# Altium PCB PCB_BLDC_DRV_Havoc_utlis_2025-07-22.pcbdoc (part 2 of 2)
Units mm, origin at the board's own origin, x right, y up, seen from the top; angles counter-clockwise.
Board outline 137.44 x 106.49 mm, 2 copper layers (Top Layer, Bottom Layer); 116 components, 98 nets, 405 pads, 307 vias.
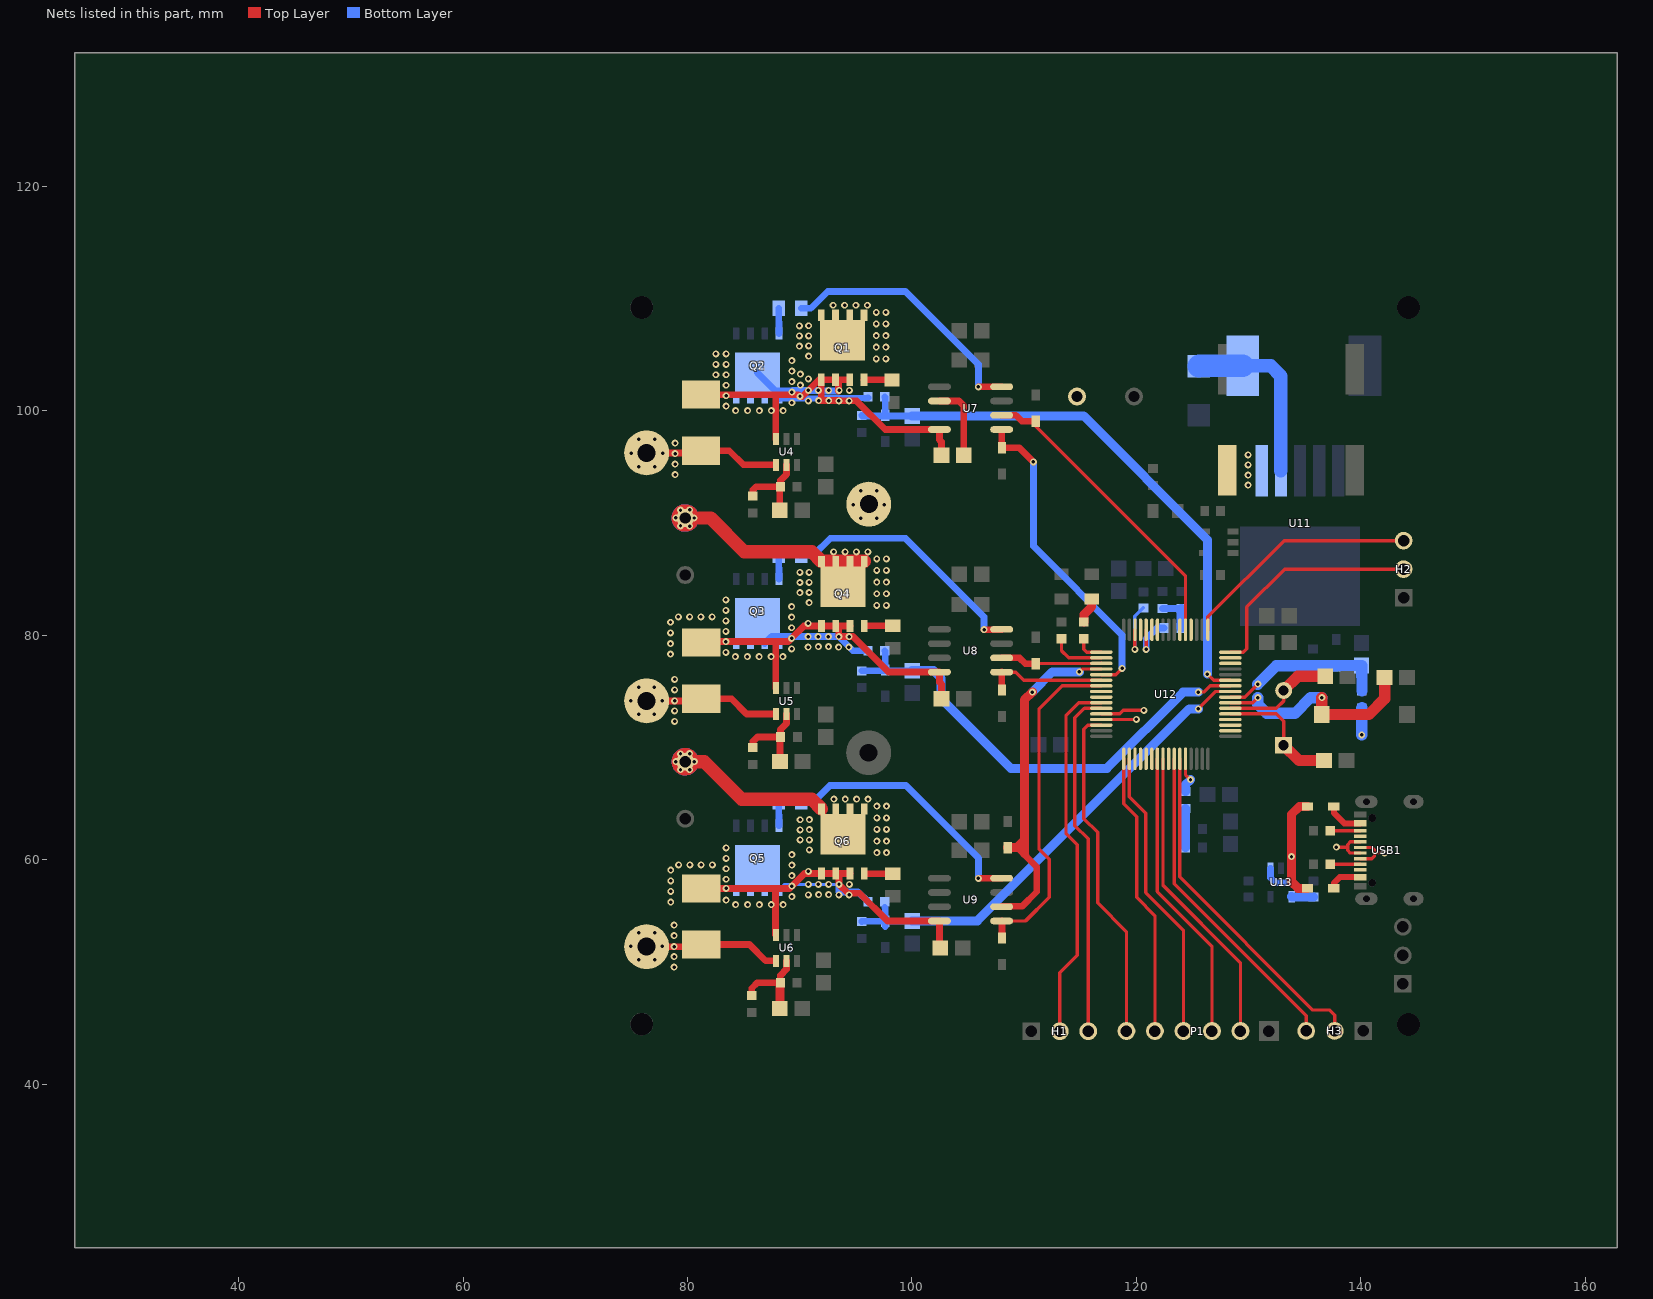
[diagram p2: the nets of this part, all layers, seen from the top]

## Via types
v1: diameter 0.62, hole 0.31, Top Layer to Bottom Layer, tented both sides, 307 vias

## Nets (pads, with @x,y where several pads share a name; then routed paths per layer and width w, separated by ;. In a path a pad name is that pad's centre, name@x,y a point inside that pad or via, vN(x,y) a via of type N, cw(c..) or ccw(c..) an arc to the next point about the centre after c; other vN are vias at no path point) (continued)
I2C1_SCL: H3.3 U12.58 | length 29.1
  Top Layer w0.3: U12.58@123.37,68.981 123.37,57.831 135.13,46.071 H3.3@135.13,44.731
I2C1_SDA: H3.2 U12.59 | length 30.8
  Top Layer w0.3: U12.59@123.87,68.981 123.87,58.451 135.729,46.591 137.22,46.591 137.67,46.142 H3.2@137.67,44.731
JTCK_SWCLK: P1.5 U12.49 | length 25.4
  Top Layer w0.3: U12.49@118.87,68.981 118.869,64.981 120.019,63.83 120.019,56.642 121.65,55.011 P1.5@121.65,44.719
JTDI: P1.4 U12.50 | length 26.3
  Top Layer w0.3: U12.50@119.37,68.981 119.369,65.58 120.82,64.13 120.82,57.061 124.19,53.691 P1.4@124.19,44.72
JTDO: P1.3 U12.55 | length 26.3
  Top Layer w0.3: U12.55@121.871,68.981 121.871,57.15 126.73,52.291 P1.3@126.73,44.72
JTMS_SWDIO: P1.6 U12.46 | length 30.2
  Top Layer w0.3: U12.46@116.87,71.98 115.671,71.981 115.32,71.631 115.32,63.64 116.54,62.421 116.54,56.152 119.11,53.581 P1.6@119.11,44.719
LO1: R2.1 U7.8 | length 23.2
  Top Layer w0.6: v1(105.92,102.13) U7.8@107.992,102.135
  Bottom Layer w0.6: R2.1@90.121,109.131 90.99,109.131 92.491,110.63 99.42,110.63 105.92,104.13 v1(105.92,102.13)
LO2: R3.1 U8.8 | length 22.5
  Top Layer w0.6: v1(106.42,80.49) 107.967,80.49 U8.8@107.992,80.515
  Bottom Layer w0.6: R3.1@90.12,87.13 91.22,87.131 92.718,88.629 99.419,88.629 106.42,81.628 v1(106.42,80.49)
LO3: R6.1 U9.8 | length 23
  Top Layer w0.6: v1(105.92,58.33) U9.8@107.992,58.336
  Bottom Layer w0.6: R6.1@90.121,65.131 91.221,65.131 92.681,66.591 99.458,66.591 105.92,60.13 v1(105.92,58.33)
MA_CS: C7.1 Q1.1 Q1.2 Q1.3 Q2.5 Q2.6 Q2.7 Q2.8 R13.2 U1.2 U4.3 U7.4 | length 50.9
  Top Layer w0.6: U1.2@81.22,101.43 89.86,101.43 v1(90.02,101.27) 90.224,101.27 91.709,102.755 Q1.1@91.915,102.755 Q1.3@94.455,102.755 ; 87.83,101.43 87.87,101.39 U4.3@87.87,97.479 ; Q1.1@91.915,102.755 91.914,101.105 91.73,100.92 91.73,100.9 92.68,100.9 93.597,100.9 93.616,100.881 94.403,100.881 95.059,100.881 97.614,98.326 U7.4@102.447,98.325 ; Q1.2@93.185,102.755 93.46,102.48 v1@93.46,101.76 ; U7.4@102.447,98.325 102.447,97.403 102.62,97.23 C7.1@102.62,96.03
  Bottom Layer w0.6: Q2.8@86.24,103.372 87.852,101.76 89.299,101.76 89.344,101.806 90.76,101.806 92.004,101.806 92.05,101.76 92.761,101.76 v1@93.46,101.76 ; Q2.5@88.15,101.06 R13.2@96.072,101.156
  other v1: 84.29,100.01 85.347,100.01 86.405,100.01 87.462,100.01 88.52,100.01 83.442,100.4 89.295,100.71 90.765,100.871 93.494,100.871 94.403,100.871 91.674,100.9 92.584,100.9 83.442,101.334 89.295,101.65 90.765,101.806 91.661,101.805 92.581,101.805 93.5,101.805 94.42,101.805 83.442,102.268 90.06,102.28 89.295,102.59 90.76,102.84 82.53,103.203 83.442,103.203 90.05,103.26 89.295,103.531 82.53,104.137 83.442,104.137 89.295,104.471 82.53,105.071 83.442,105.071
MA_PH: pad.2@76.35,96.24 U1.1 U4.4 | length 12.1
  Top Layer w0.6: pad.2@76.4,96.24 81.03,96.24 U1.1@81.22,96.43 ; U1.1@81.221,96.431 83.72,96.431 84.97,95.182 U4.4@87.871,95.182
  other v1: 78.89,94.311 75.67,95.011 77.07,95.011 78.89,95.243 78.89,96.175 74.97,96.223 77.77,96.223 78.89,97.108 75.67,97.435 77.07,97.435
MA_VSENSE: C19.2 D7.1 R13.1 R14.2 U12.11 | length 51.3
  Top Layer w0.3: v1(126.32,76.531) 126.87,75.981 U12.11@128.37,75.98
  Bottom Layer w0.6: R14.2@95.52,99.584 95.573,99.531 C19.2@100.02,99.53 ; R13.1@97.573,101.23 97.62,101.183 D7.1@97.62,99.603
  Bottom Layer w0.8: C19.2@100.02,99.53 115.29,99.53 126.319,88.501 v1(126.32,76.531)
MB_CS: C8.1 Q3.5 Q3.6 Q3.7 Q3.8 Q4.1 Q4.2 Q4.3 R16.2 U2.2 U5.3 U8.4 | length 43.9
  Top Layer w0.6: U2.2@81.221,79.431 88.982,79.431 v1(89.271,79.72) 90.366,80.815 Q4.3@94.475,80.815 Q4.1@91.935,80.815 ; U5.3@87.87,75.279 87.87,79.431 ; Q4.2@93.205,80.815 93.477,80.543 v1(93.477,79.875) 94.734,79.875 97.904,76.706 U8.4@102.447,76.705 102.448,75.803 102.62,75.63 C8.1@102.62,74.33
  Bottom Layer w0.6: Q3.6@86.875,79.255 87.494,79.875 v1(93.477,79.875) 94.741,78.611 95.647,78.611
  other v1: 84.266,78.08 85.324,78.08 86.381,78.08 87.439,78.08 88.496,78.08 78.481,78.3 83.419,78.47 89.271,78.78 90.741,78.941 93.47,78.941 94.38,78.941 91.651,78.97 92.56,78.97 78.481,79.25 83.419,79.431 90.741,79.875 91.637,79.874 92.557,79.875 94.396,79.875 78.481,80.2 83.419,80.338 89.271,80.66 90.741,81.041 78.481,81.15 83.419,81.272 79.186,81.62 80.19,81.62 81.194,81.62 82.198,81.62 89.271,81.6 83.419,82.206 89.271,82.54 83.419,83.14
MB_PH: pad.2@76.35,74.14 U2.1 U5.4 | length 12.1
  Top Layer w0.6: pad.2@76.4,74.14 81.03,74.14 U2.1@81.22,74.33 83.921,74.331 85.27,72.982 U5.4@87.871,72.982
  other v1: 78.85,72.321 75.64,72.941 77.04,72.941 78.85,73.253 74.94,74.153 77.74,74.153 78.85,74.141 78.85,75.118 75.64,75.365 77.04,75.365 78.85,76.05
MB_VSENSE: C20.2 D8.1 R15.2 R16.1 U12.10 | length 44.7
  Top Layer w0.3: v1(125.52,74.93) 126.02,74.93 126.57,75.481 U12.10@128.37,75.481
  Bottom Layer w0.6: R15.2@95.521,76.825 C20.2@100.02,76.831 ; R16.1@97.573,78.61 97.62,78.563 D8.1@97.62,76.903 97.692,76.831 C20.2@100.02,76.831
  Bottom Layer w0.8: C20.2@100.02,76.831 101.93,76.83 102.6,76.159 102.6,74.341 108.81,68.131 117.36,68.131 124.16,74.93 v1@125.521,74.93
MC_CS: C9.1 Q5.5 Q5.6 Q5.7 Q5.8 Q6.1 Q6.2 Q6.3 R18.2 U3.2 U6.3 U9.4 | length 40.9
  Top Layer w0.6: U3.2@81.221,57.43 89.091,57.43 v1(89.291,57.63) 90.416,58.755 Q6.3@94.475,58.756 ; 87.843,57.43 87.843,53.307 U6.3@87.87,53.28 ; Q6.2@93.205,58.756 93.497,58.463 v1(93.497,57.785) 94.281,57 95.341,57 97.815,54.526 U9.4@102.447,54.526 102.448,53.603 102.448,52.203 C9.1@102.52,52.131
  Bottom Layer w0.3: Q5.5@88.144,57.255 88.673,57.785 v1(93.497,57.785)
  Bottom Layer w0.6: v1(93.497,57.785) 93.497,57.12 95.196,57.12 R18.2@96.067,56.251
  other v1: 84.286,55.99 85.344,55.99 86.401,55.99 87.459,55.99 88.516,55.99 78.501,56.21 83.439,56.38 89.291,56.69 90.761,56.85 93.49,56.85 94.4,56.851 91.671,56.88 92.581,56.88 78.501,57.16 83.439,57.43 90.761,57.786 91.658,57.785 92.577,57.785 94.416,57.785 78.501,58.11 83.439,58.248 89.291,58.57 90.761,58.95 78.501,59.06 83.439,59.182 89.291,59.51 79.206,59.53 80.21,59.53 81.214,59.53 82.218,59.53 83.439,60.116 89.291,60.45 83.439,61.05
MC_PH: pad.2@76.35,52.241 U3.1 U6.4 | length 12.2
  Top Layer w0.6: pad.2@76.3,52.241 81.03,52.241 U3.1@81.22,52.431 85.511,52.431 86.959,50.98 U6.4@87.871,50.98
  other v1: 78.8,50.421 75.66,51.061 77.06,51.06 78.8,51.353 78.8,52.241 74.96,52.273 77.76,52.273 78.8,53.218 75.66,53.485 77.06,53.485 78.8,54.151
MC_VSENSE: C21.2 D9.1 R17.2 R18.1 U12.9 | length 43.1
  Top Layer w0.3: v1(125.52,73.43) 127.07,74.981 U12.9@128.37,74.98
  Bottom Layer w0.6: R17.2@95.521,54.483 D9.1@97.62,54.503 ; 97.573,55.751 97.62,55.703 97.62,54.003 ; D9.1@97.62,54.503 99.992,54.503 C21.2@100.02,54.531
  Bottom Layer w0.8: C21.2@100.02,54.531 105.821,54.531 124.721,73.432 v1@125.521,73.432
NC: 
NJTRST: P1.2 U12.56 | length 27.1
  Top Layer w0.3: U12.56@122.37,68.981 122.369,57.719 129.27,50.818 P1.2@129.27,44.72
Q1_4: Q1.4 R1.2 | length 2.5
  Top Layer w0.6: Q1.4@95.725,102.755 R1.2@98.22,102.73
Q2_4: Q2.4 R2.2 | length 2.2
  Bottom Layer w0.6: R2.2@88.12,109.13 Q2.4@88.145,106.885
Q3_4: Q3.4 R3.2 | length 2.1
  Bottom Layer w0.6: R3.2@88.12,87.13 Q3.4@88.145,85.005
Q4_4: Q4.4 R4.2 | length 2.5
  Top Layer w0.6: Q4.4@95.745,80.815 R4.2@98.282,80.831
Q5_4: Q5.4 R6.2 | length 2.1
  Bottom Layer w0.6: R6.2@88.12,65.131 Q5.4@88.145,63.005
Q6_4: Q6.4 R5.2 | length 2.5
  Top Layer w0.6: Q6.4@95.745,58.756 R5.2@98.282,58.731
QH1: D2.1 U7.5 U12.37 | length 28.7
  Top Layer w0.3: U12.37@116.87,76.481 118.17,76.481 v1(118.72,77.03)
  Top Layer w0.6: U7.5@107.992,98.325 107.992,96.73 108.02,96.703 109.547,96.703 v1(110.82,95.43)
  Bottom Layer w0.6: v1(110.82,95.43) 110.82,87.931 118.72,80.03 v1(118.72,77.03)
QH2: D4.1 U8.5 U12.38 | length 10.8
  Top Layer w0.3: U8.5@107.992,76.705 109.245,76.706 109.969,75.982 U12.38@116.87,75.98
  Top Layer w0.6: U8.5@107.992,76.705 107.992,75.131 D4.1@108.02,75.103
QH3: D6.1 U9.5 U12.39 | length 30.2
  Top Layer w0.3: U9.5@107.992,54.526 110.116,54.526 112.219,56.629 112.219,60.03 111.32,60.93 111.32,73.432 113.37,75.481 U12.39@116.87,75.481
  Top Layer w0.6: U9.5@107.992,54.526 108.02,54.498 D6.1@108.02,53.003
QL1: D1.1 U7.6 U12.21 | length 27.4
  Top Layer w0.3: D1.1@111.02,99.058 111.048,99.03 111.048,98.603 124.37,85.281 U12.21@124.37,80.48
  Top Layer w0.6: U7.6@107.992,99.595 109.255,99.596 109.793,99.058 D1.1@111.02,99.058
QL2: D3.1 U8.6 U12.35 | length 9.1
  Top Layer w0.3: D3.1@111.02,77.458 U12.35@116.87,77.481
  Top Layer w0.6: U8.6@107.992,77.975 109.575,77.976 110.093,77.457 D3.1@111.02,77.458
QL3: D5.1 U9.6 U12.36 | length 33.3
  Top Layer w0.3: v1(114.92,76.73) 115.17,76.981 U12.36@116.87,76.98
  Top Layer w0.6: U9.6@107.992,55.796 108.028,55.829 109.819,55.829 111.119,57.13 111.119,59.329 109.392,61.059 D5.1@108.521,61.059
  Top Layer w0.8: D5.1@108.52,61.058 109.347,61.058 110.02,61.73 110.02,74.23 v1(110.72,74.93) ; 110.02,60.531 110.02,62.33
  Bottom Layer w0.8: v1(110.72,74.93) 112.52,76.73 v1(114.92,76.73)
R21_2: R21.2 R22.2 R23.2 | length 3.5
  Bottom Layer w0.6: R23.2@122.32,82.377 R22.2@124.02,82.377
  Bottom Layer w0.8: R21.2@123.973,80.63 123.973,82.331 R22.2@124.02,82.377
R24_2: R24.2 R25.2 R26.2 | length 3.5
  Bottom Layer w0.8: R26.2@124.37,64.547 R24.2@124.367,62.72 R25.2@124.377,61.08
R31_2: DS3.2 R31.2 | length 2.3
  Top Layer w0.8: R31.2@115.32,81.184 115.32,81.831 116.019,82.53 DS3.2@116.02,83.231
S$164: 
U7_2: C7.2 U7.2 | length 6.8
  Top Layer w0.6: U7.2@102.447,100.865 104.185,100.865 104.62,100.43 C7.2@104.62,96.03
U11_2: D11.1 L1.2 U11.2 | length 16.1
  Bottom Layer w1.2: L1.2@129.471,104 131.96,104 132.879,103.081 U11.2@132.88,94.65
  Bottom Layer w2: D11.1@125.57,103.98 125.59,104 L1.2@129.47,104
U12_2: U12.2
U12_3: U12.3
U12_4: U12.4
U12_5: C37.1 U12.5 X1.1 | length 11.3
  Top Layer w0.3: U12.5@128.371,72.979 132.47,72.979 133.121,72.332 X1.1@133.121,70.19
  Top Layer w1: X1.1@133.12,70.19 134.48,68.831 C37.1@136.72,68.83
U12_6: C38.1 U12.6 X1.2 | length 10.2
  Top Layer w0.3: U12.6@128.371,73.48 132.47,73.48 133.121,74.13 X1.2@133.121,75.07
  Top Layer w1: X1.2@133.12,75.07 134.38,76.33 C38.1@136.82,76.33
U12_7: C36.1 RESET1.2 U12.7 | length 19.4
  Top Layer w0.3: U12.7@128.37,73.98 130.37,73.981 v1(130.82,74.43)
  Top Layer w1: v1(136.52,74.43) RESET1.2@136.52,72.931 140.72,72.93 142.12,74.33 C36.1@142.12,76.23
  Bottom Layer w1: v1(130.82,74.43) 130.819,73.83 131.62,73.03 134.119,73.03 135.521,74.43 v1(136.52,74.43)
U12_14: U12.14
U12_15: U12.15
U12_20: U12.20
U12_22: U12.22
U12_26: U12.26
U12_27: U12.27
U12_28: R21.1 U12.28 | length 4.7
  Top Layer w0.3: v1(120.87,78.73) U12.28@120.87,80.48
  Bottom Layer w0.6: v1(120.87,78.73) 120.87,79.68 121.82,80.63 R21.1@122.467,80.63
U12_29: U12.29
U12_30: C39.2 U12.30 | length 5.8
  Top Layer w0.3: v1(119.86,78.73) 119.86,80.47 U12.30@119.87,80.48
  Bottom Layer w0.3: v1(119.86,78.73) 119.86,81.67 C39.2@120.62,82.431
U12_33: R31.1 U12.33 | length 2.6
  Top Layer w0.3: R31.1@115.32,79.677 115.32,78.73 115.569,78.481 U12.33@116.87,78.481
U12_34: R30.1 U12.34 | length 4.9
  Top Layer w0.3: R30.1@113.32,79.677 113.32,78.63 113.97,77.98 U12.34@116.87,77.98
U12_40: U12.40
U12_41: U12.41
U12_51: U12.51
U12_52: U12.52
U12_53: U12.53
U12_54: U12.54
U12_57: U12.57
U12_60: R26.1 U12.60 | length 3.3
  Top Layer w0.3: U12.60@124.37,68.981 124.37,67.579 v1(124.82,67.131)
  Bottom Layer w0.8: R26.1@124.37,66.054 124.37,66.681 v1(124.82,67.131)
U13_4: C41.2 U13.4 | length 1.9
  Bottom Layer w0.8: U13.4@133.84,56.689 133.859,56.67 C41.2@135.77,56.671
USART1_RX: H1.3 U12.43 | length 31.1
  Top Layer w0.3: H1.3@115.71,44.701 115.709,61.841 114.52,63.03 114.52,72.631 115.369,73.48 U12.43@116.87,73.481
USART1_TX: H1.2 U12.42 | length 32.8
  Top Layer w0.3: H1.2@113.17,44.701 113.169,49.921 114.721,51.471 114.721,61.331 113.72,62.332 113.72,72.83 114.871,73.98 U12.42@116.87,73.98
USART2_RX: H2.3 U12.17 | length 21.5
  Top Layer w0.3: U12.17@126.37,80.48 126.369,81.631 133.159,88.42 H2.3@143.949,88.42
USART2_TX: H2.2 U12.16 | length 20.8
  Top Layer w0.3: U12.16@128.371,78.481 129.539,78.481 129.829,78.771 129.829,82.509 133.199,85.88 H2.2@143.949,85.88
USB1_2: D12.2 USB1.2 | length 3
  Top Layer w0.53: D12.2@137.592,57.431 137.591,57.902 138.119,58.43 USB1.2@139.946,58.43
USB1_3: USB1.3
USB1_4: R27.1 USB1.4 | length 2.7
  Top Layer w0.3: R27.1@137.273,59.581 USB1.4@139.945,59.581
USB1_9: USB1.9
USB1_10: R28.1 USB1.10 | length 2.7
  Top Layer w0.3: R28.1@137.273,62.581 USB1.10@139.945,62.581
USB1_11: D13.2 USB1.11 | length 3.3
  Top Layer w0.53: D13.2@137.592,64.731 137.591,64.158 138.521,63.231 USB1.11@139.946,63.231
USB_5V: D12.1 D13.1 U13.1 U13.3 | length 14.4
  Top Layer w0.8: D12.1@135.247,57.431 134.419,57.43 133.819,58.031 v1(133.819,60.262) 133.819,64.031 134.52,64.729 D13.1@135.247,64.731
  Bottom Layer w0.6: U13.1@131.94,59.232 131.94,58.379 132.379,57.94 133.39,57.94 133.84,58.39 U13.3@133.84,59.232 v1(133.819,60.262)
USB_DM: U12.44 USB1.5 USB1.7 | length 34.8
  Top Layer w0.3: U12.44@116.87,72.98 118.52,72.98 118.84,73.3 v1(120.66,73.3) ; USB1.5@139.946,60.081 140.969,60.081 141.221,60.33 141.221,60.831 140.969,61.079 USB1.7@139.946,61.079 ; 141.221,60.528 141.273,60.58 v1(142.11,60.58)
  Mid-Layer 2 w0.6: v1(120.66,73.3) 125.021,68.941 131.871,68.941 140.23,60.582 v1(142.11,60.58)
USB_DP: U12.45 USB1.6 USB1.8 | length 32.8
  Top Layer w0.3: U12.45@116.87,72.481 v1(119.99,72.49) ; v1(137.82,61.101) 138.778,61.101 138.82,61.143 ; USB1.6@139.946,60.582 139.069,60.582 138.82,60.831 138.82,61.341 139.059,61.58 USB1.8@139.946,61.58
  Mid-Layer 2 w0.6: v1(119.99,72.49) 121.879,70.599 121.879,66.601 123.469,65.011 130.52,65.011 135.361,60.17 136.38,60.17 137.309,61.1 v1(137.82,61.101)
VBAT+: C16.1 C17.1 C18.1 C27.1 pad.2@96.15,91.671 Q1.5 Q1.6 Q1.7 Q1.8 Q4.5 Q4.6 Q4.7 Q4.8 Q6.5 Q6.6 Q6.7 Q6.8 R20.2 U11.1 | length 195.9
  Top Layer w0.8: C16.1@79.791,90.439 v1(80.58,90.439) ; v1(80.611,68.721) ccw(c79.79,68.721) v1(80.611,68.721) ; v1@80.611,90.44 ccw(c79.79,90.44) v1@80.611,90.44
  Top Layer w1.2: C17.1@79.791,68.72 81.49,68.72 84.83,65.38 91.058,65.38 Q6.8@91.935,64.506 ; C16.1@79.791,90.439 82.059,90.439 85.059,87.44 91.061,87.44 Q4.8@91.935,86.565 Q4.5@95.745,86.565
  Mid-Layer 1 w0.8: v1(80.611,68.721) ccw(c79.79,68.721) v1(80.611,68.721) ; v1@80.611,90.44 ccw(c79.79,90.44) v1@80.611,90.44
  Mid-Layer 1 w1.2: v1@92.98,109.41 96.15,106.24 pad.2@96.15,91.671 105.11,91.67 C18.1@114.7,101.26 116.369,101.26 122.463,95.166 v1@129.961,95.166 ; v1(93.025,87.425) 96.985,87.425 100.49,83.92 100.49,66.431 99.36,65.3 93.3,65.3 v1@93.21,65.39 ; v1(129.96,93.36) 140.08,83.24 v1(140.08,71.11)
  Mid-Layer 2 w0.8: v1(80.611,68.721) ccw(c79.79,68.721) v1(80.611,68.721) ; v1@80.611,90.44 ccw(c79.79,90.44) v1@80.611,90.44
  Bottom Layer w0.8: v1(80.611,68.721) ccw(c79.79,68.721) v1(80.611,68.721) ; v1@80.611,90.44 ccw(c79.79,90.44) v1@80.611,90.44
  Bottom Layer w1: v1(140.08,71.11) 140.08,73.517 R20.2@140.09,73.527
  other v1: 96.875,60.611 97.73,60.611 90.855,60.861 96.875,61.648 97.73,61.648 90.03,61.751 90.855,61.76 90.03,62.651 90.855,62.661 96.875,62.686 97.73,62.686 90.03,63.551 90.855,63.561 96.875,63.723 97.73,63.723 96.875,64.76 97.73,64.76 93.04,65.386 94.053,65.386 95.066,65.386 96.08,65.386 80.193,68.005 79.372,68.014 78.968,68.721 79.372,69.427 80.193,69.436 96.86,82.65 97.715,82.65 90.84,82.901 96.86,83.688 97.715,83.688 90.015,83.791 90.84,83.801 90.015,84.691 90.84,84.7 96.86,84.726 97.715,84.726 90.015,85.591 90.84,85.6 96.86,85.763 97.715,85.763 96.86,86.801 97.715,86.801 94.038,87.426 95.051,87.425 96.065,87.425 80.193,89.725 79.372,89.733 95.45,90.428 96.85,90.428 78.968,90.44 79.372,91.147 80.193,91.156 94.75,91.641 97.55,91.641 95.45,92.853 96.85,92.853 129.96,94.264 129.96,95.167 129.96,96.071 96.815,104.62 97.67,104.62 90.795,104.87 96.815,105.658 97.67,105.658 89.97,105.761 90.795,105.771 89.97,106.661 90.795,106.67 96.815,106.695 97.67,106.695 89.97,107.56 90.795,107.57 96.815,107.733 97.67,107.733 96.815,108.771 97.67,108.771 92.98,109.395 93.993,109.395 95.006,109.395 96.02,109.395
VBAT_VSENSE: C22.2 D10.1 R19.2 R20.1 U12.8 | length 15.1
  Top Layer w0.3: U12.8@128.37,74.481 129.67,74.481 v1(130.82,75.63)
  Bottom Layer w1: v1(130.82,75.63) 132.467,77.277 R19.2@135.74,77.277 ; R19.2@135.74,77.277 D10.1@137.81,77.278 C22.2@140.07,77.29 R20.1@140.09,75.034
VREFA_1.65: C1.2 R7.1 R8.2 U4.5 | length 7.4
  Top Layer w0.6: R8.2@85.821,92.382 85.821,92.931 86.121,93.231 R7.1@88.267,93.23 ; C1.2@88.22,91.13 88.22,93.184 R7.1@88.267,93.23 ; U4.5@88.821,95.182 88.821,94.331 88.267,93.777 R7.1@88.267,93.23
VREFB_1.65: C3.2 R9.2 R10.1 U5.5 | length 7.7
  Top Layer w0.6: R9.2@85.821,69.985 85.826,70.536 86.225,70.93 R10.1@88.277,70.931 88.277,71.587 88.821,72.131 U5.5@88.821,72.982 ; C3.2@88.23,68.731 88.23,70.884 R10.1@88.277,70.931
VREFC_1.65: C5.2 R11.2 R12.1 U6.5 | length 7.9
  Top Layer w0.6: R11.2@85.72,47.884 85.719,48.532 86.22,49.03 R12.1@88.267,49.031 88.267,49.677 88.821,50.231 U6.5@88.821,50.98
  Top Layer w0.8: C5.2@88.22,46.731 88.22,48.984 R12.1@88.267,49.031
pads on no net: USB1.

## Polygon pours and split planes (outlines as drawn)
12V on Bottom Layer (solid): 138.91,106.72 138.94,106.75 143.15,106.75 143.17,106.73 143.17,101.28 143.16,101.29 138.9,101.29 138.88,101.31 138.88,106.75
VBAT+ on Bottom Layer (solid): 128.61,96.94 128.62,96.93 131.73,96.93 131.77,96.88 131.77,92.38 131.73,92.42 128.6,92.42
NC on Bottom Layer (solid): 128.68,110.23 128.7,110.21 141.08,110.21 141.1,110.19 141.1,97.89 141.07,97.86 128.68,97.86
MA_CS on Bottom Layer (solid): 65.94,105.42 88.91,105.42 88.95,105.42 90.88,103.49 94.59,103.49 94.76,103.32 94.76,100.25 94.75,100.24 94.71,100.24 93.95,99.48 65.95,99.48 64.3,102.54
MA_PH on Bottom Layer (solid): 68.47,98.47 85.22,98.47 85.22,94.62 84.46,93.86 68.46,93.86 68.45,93.87 66.96,96.23
GND on Bottom Layer (solid): 68.059,106.02 87.159,106.02 87.399,106.26 87.399,107.95 86.999,108.35 86.999,113.86 86.059,114.8 68.049,114.84 64.829,110.36
VBAT+ on Bottom Layer (solid): 87.585,114.795 87.585,108.585 88.095,108.075 88.095,106.065 89.195,106.065 91.065,104.195 101.065,104.195 101.075,104.185 101.075,104.205 101.305,104.435 101.305,107.525 103.935,110.155 103.935,114.775 103.955,114.795
MB_CS on Bottom Layer (solid): 65.992,83.52 88.96,83.52 89.001,83.52 90.931,81.59 94.64,81.59 94.811,81.42 94.811,78.35 94.801,78.34 94.761,78.34 94.001,77.58 66.001,77.58 64.351,80.64
MC_CS on Bottom Layer (solid): 65.982,61.57 88.95,61.57 88.99,61.57 90.92,59.64 94.63,59.64 94.8,59.47 94.8,56.4 94.79,56.39 94.75,56.39 93.99,55.63 65.992,55.63 64.341,58.69
MB_PH on Bottom Layer (solid): 68.481,76.47 85.23,76.47 85.23,72.62 84.47,71.86 68.471,71.86 68.461,71.87 66.97,74.23
MC_PH on Bottom Layer (solid): 68.46,54.59 85.21,54.59 85.21,50.74 84.45,49.98 68.45,49.98 68.44,49.99 66.95,52.35
VBAT+ on Bottom Layer (solid): 96.936,94.689 100.437,91.189 100.437,91.169 100.487,91.119 104.686,91.119 104.706,91.099 104.706,86.169 101.907,83.369 101.907,80.929 101.807,80.829 88.137,80.829 87.967,81.169 87.907,88.609 88.767,88.619 89.907,88.619 93.247,91.959 93.247,94.699
VBAT+ on Bottom Layer (solid): 99.54,66.89 101.25,65.231 99.78,63.76 99.78,63.67 99.78,58.54 99.75,58.57 87.88,58.57 87.68,58.77 87.72,65.541 91.07,65.501 92.47,66.901
GND on Bottom Layer (solid): 58.15,119.19 149.78,119.19 150.14,118.83 150.14,38.291 149.95,38.101 57.97,38.101 43.18,79.19
NC on Mid-Layer 2 (solid): 128.68,110.23 128.7,110.21 141.08,110.21 141.1,110.19 141.1,97.89 141.07,97.86 128.68,97.86
MA_CS on Mid-Layer 2 (solid): 88.91,105.42 88.95,105.42 90.88,103.49 94.59,103.49 94.76,103.32 94.76,100.25 94.75,100.24 94.71,100.24 93.95,99.48 83.81,99.48 82.89,100.3 82.9,102.22 82.07,102.81 82.06,105.42
MA_PH on Mid-Layer 2 (solid): 68.47,98.47 77.85,98.47 79.27,97.31 79.27,94.18 78.95,93.86 68.46,93.86 68.45,93.87 67.77,96.17
VBAT+ on Mid-Layer 2 (solid): 87.585,114.795 87.585,108.585 88.095,108.075 88.095,106.065 89.195,106.065 91.065,104.195 101.065,104.195 101.075,104.185 101.075,104.205 101.305,104.435 101.305,107.525 103.935,110.155 103.935,114.775 103.955,114.795 95.77,117.13
GND on Mid-Layer 2 (solid): 68.06,106.02 87.159,106.02 87.399,106.26 87.399,107.95 86.999,108.35 86.999,113.86 86.059,114.8 68.05,114.84 66.97,110.4
MB_CS on Mid-Layer 2 (solid): 65.991,83.52 88.96,83.52 89,83.52 90.931,81.59 94.64,81.59 94.81,81.42 94.81,78.35 94.8,78.34 94.76,78.34 94.001,77.58 66.001,77.58 64.811,80.64
MC_CS on Mid-Layer 2 (solid): 65.981,61.57 88.95,61.57 88.99,61.57 90.92,59.64 94.63,59.64 94.8,59.47 94.8,56.4 94.79,56.39 94.75,56.39 93.99,55.63 65.991,55.63 64.801,58.69
MB_PH on Mid-Layer 2 (solid): 68.481,76.47 85.231,76.47 85.231,72.62 84.471,71.86 68.471,71.86 68.461,71.87 67.78,74.17
MC_PH on Mid-Layer 2 (solid): 68.46,54.59 85.21,54.59 85.21,50.74 84.45,49.98 68.45,49.98 68.44,49.99 67.76,52.29
VBAT+ on Mid-Layer 2 (solid): 97.81,93.79 100.436,91.189 100.436,91.169 100.486,91.119 104.686,91.119 104.706,91.099 104.706,86.169 101.906,83.369 101.906,80.929 101.806,80.829 88.136,80.829 87.966,81.169 87.906,88.609 88.766,88.619 89.906,88.619 93.246,91.959 94.84,93.77
VBAT+ on Mid-Layer 2 (solid): 101.78,66.92 101.78,65.76 99.78,63.76 99.78,63.67 99.78,58.54 99.75,58.57 87.88,58.57 87.68,58.77 87.68,66.92
GND on Mid-Layer 2 (solid): 58.15,119.19 149.78,119.19 150.14,118.83 150.14,38.29 149.95,38.1 57.97,38.1 45.25,79.24
NC on Mid-Layer 1 (solid): 128.68,110.23 128.7,110.21 141.08,110.21 141.1,110.19 141.1,97.89 141.07,97.86 128.68,97.86
MA_CS on Mid-Layer 1 (solid): 65.94,105.42 88.91,105.42 88.95,105.42 90.88,103.49 94.59,103.49 94.76,103.32 94.76,100.25 94.75,100.24 94.71,100.24 93.95,99.48 65.95,99.48 65.34,102.54
MA_PH on Mid-Layer 1 (solid): 68.471,98.47 85.22,98.47 85.22,94.62 84.46,93.86 68.461,93.86 68.451,93.87 67.4,96.25
GND on Mid-Layer 1 (solid): 68.059,106.02 87.159,106.02 87.399,106.26 87.399,107.95 86.999,108.35 86.999,113.86 86.059,114.8 68.049,114.84 65.699,110.47
VBAT+ on Mid-Layer 1 (solid): 87.585,114.795 87.585,108.585 88.095,108.075 88.095,106.065 89.195,106.065 91.065,104.195 101.065,104.195 101.075,104.185 101.075,104.205 101.305,104.435 101.305,107.525 103.935,110.155 103.935,114.775 103.955,114.795 95.8,116.06
MB_CS on Mid-Layer 1 (solid): 65.991,83.52 88.961,83.52 89.001,83.52 90.931,81.59 94.64,81.59 94.811,81.42 94.811,78.35 94.8,78.34 94.761,78.34 94.001,77.58 66.001,77.58 65.391,80.64
MC_CS on Mid-Layer 1 (solid): 65.981,61.57 88.95,61.57 88.99,61.57 90.92,59.64 94.63,59.64 94.8,59.47 94.8,56.4 94.79,56.39 94.75,56.39 93.99,55.63 65.991,55.63 65.381,58.69
MB_PH on Mid-Layer 1 (solid): 68.481,76.47 85.231,76.47 85.231,72.62 84.471,71.86 68.471,71.86 68.461,71.87 67.41,74.25
MC_PH on Mid-Layer 1 (solid): 68.461,54.59 85.21,54.59 85.21,50.74 84.451,49.98 68.451,49.98 68.441,49.99 67.39,52.37
VBAT+ on Mid-Layer 1 (solid): 96.936,94.689 100.436,91.189 100.436,91.169 100.486,91.119 104.686,91.119 104.706,91.099 104.706,86.169 101.906,83.369 101.906,80.929 101.806,80.829 88.136,80.829 87.966,81.169 87.906,88.609 88.766,88.619 89.906,88.619 93.246,91.959 93.246,94.699
VBAT+ on Mid-Layer 1 (solid): 101.78,66.92 101.78,65.76 99.78,63.76 99.78,63.67 99.78,58.54 99.75,58.57 87.88,58.57 87.68,58.77 87.68,66.92
VBAT+ on Mid-Layer 1 (solid): 58.15,119.19 149.78,119.19 150.14,118.83 150.14,38.29 149.95,38.1 57.97,38.1 46.99,79.19
GND on Top Layer (solid): 68.06,106.02 87.159,106.02 87.399,106.26 87.399,107.95 86.999,108.35 86.999,113.86 86.059,114.8 68.05,114.84 64.249,110.4
VBAT+ on Top Layer (solid): 127.25,96.96 127.26,96.95 130.37,96.95 130.41,96.9 130.41,92.4 130.37,92.44 127.24,92.44
NC on Top Layer (solid): 128.68,110.23 128.7,110.21 141.08,110.21 141.1,110.19 141.1,97.89 141.07,97.86 128.68,97.86
MA_CS on Top Layer (solid): 65.94,105.42 88.91,105.42 88.95,105.42 90.88,103.49 94.59,103.49 94.76,103.32 94.76,100.25 94.75,100.24 94.71,100.24 93.95,99.48 65.95,99.48 63.81,102.47
MA_PH on Top Layer (solid): 68.47,98.47 85.22,98.47 85.22,94.62 84.46,93.86 68.46,93.86 68.45,93.87 66.61,96.24
VBAT+ on Top Layer (solid): 87.585,114.795 87.585,108.585 88.095,108.075 88.095,106.065 89.195,106.065 91.065,104.195 101.065,104.195 101.075,104.185 101.075,104.205 101.305,104.435 101.305,107.525 103.935,110.155 103.935,114.775 103.955,114.795 95.77,118.35
MB_CS on Top Layer (solid): 65.991,83.52 88.96,83.52 89,83.52 90.93,81.59 94.64,81.59 94.81,81.42 94.81,78.35 94.8,78.34 94.76,78.34 94,77.58 66.001,77.58 63.861,80.57
MC_CS on Top Layer (solid): 65.981,61.57 88.95,61.57 88.99,61.57 90.92,59.64 94.63,59.64 94.8,59.47 94.8,56.4 94.79,56.39 94.75,56.39 93.99,55.63 65.991,55.63 63.851,58.62
MB_PH on Top Layer (solid): 68.48,76.47 85.23,76.47 85.23,72.62 84.47,71.86 68.47,71.86 68.46,71.87 66.62,74.24
MC_PH on Top Layer (solid): 68.46,54.59 85.21,54.59 85.21,50.74 84.45,49.98 68.45,49.98 68.44,49.99 66.6,52.36
VBAT+ on Top Layer (solid): 96.94,94.69 100.44,91.19 100.44,91.17 100.49,91.12 104.69,91.12 104.71,91.1 104.71,86.17 101.91,83.37 101.91,80.93 101.81,80.83 88.14,80.83 87.97,81.17 87.91,88.61 88.77,88.62 89.91,88.62 93.25,91.96 93.25,94.7
VBAT+ on Top Layer (solid): 101.78,66.92 101.78,65.76 99.78,63.761 99.78,63.671 99.78,58.541 99.75,58.571 87.88,58.571 87.68,58.771 87.68,66.92
GND on Top Layer (solid): 58.15,119.19 149.78,119.19 150.14,118.83 150.14,38.29 149.95,38.1 57.97,38.1 38.1,78.3

## Keep-outs
Keep-Out Layer:
  lines w0.254: 73.54,45.051 ccw(c75.54,45.051) 75.54,43.051 ; 73.54,109.63 cw(c75.54,109.63) 75.54,111.63 ; 144.54,43.051 ccw(c144.54,45.051) 146.54,45.051 ; 144.54,111.63 cw(c144.54,109.63) 146.54,109.63